# Altium PCB pcb_01.PcbDoc
Units mil, origin at the board's own origin, x right, y up, seen from the top; angles counter-clockwise.
Board outline 1975.01 x 10.03 mil, 2 copper layers (Top Layer, Bottom Layer); 8 components, 4 nets, 21 pads, 0 vias.
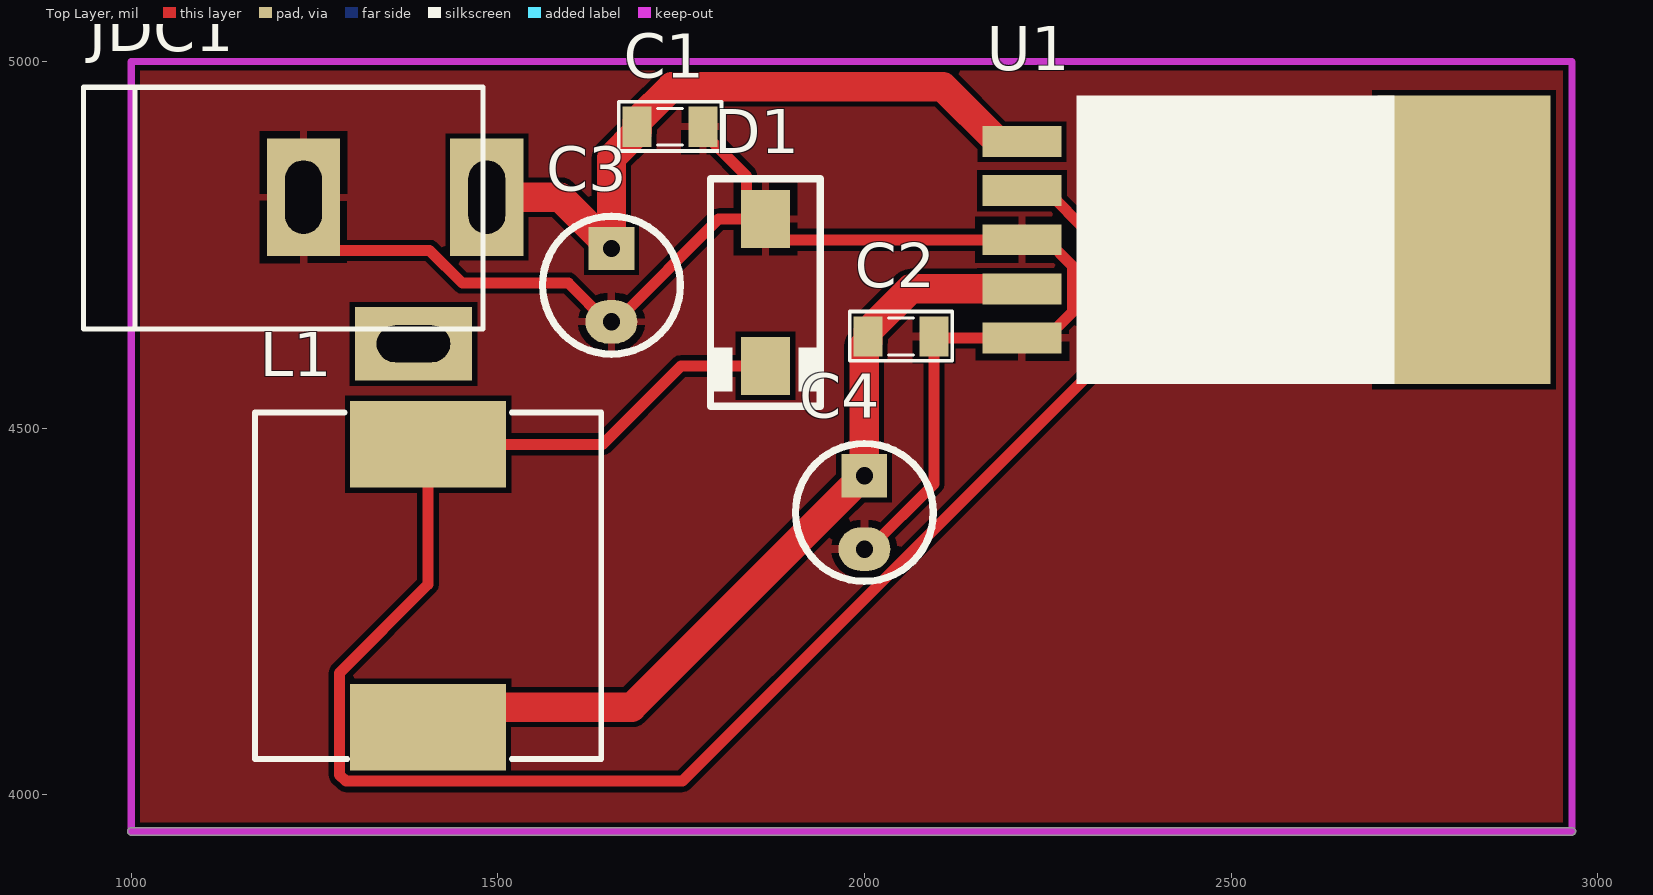
[diagram p0: Top Layer view]
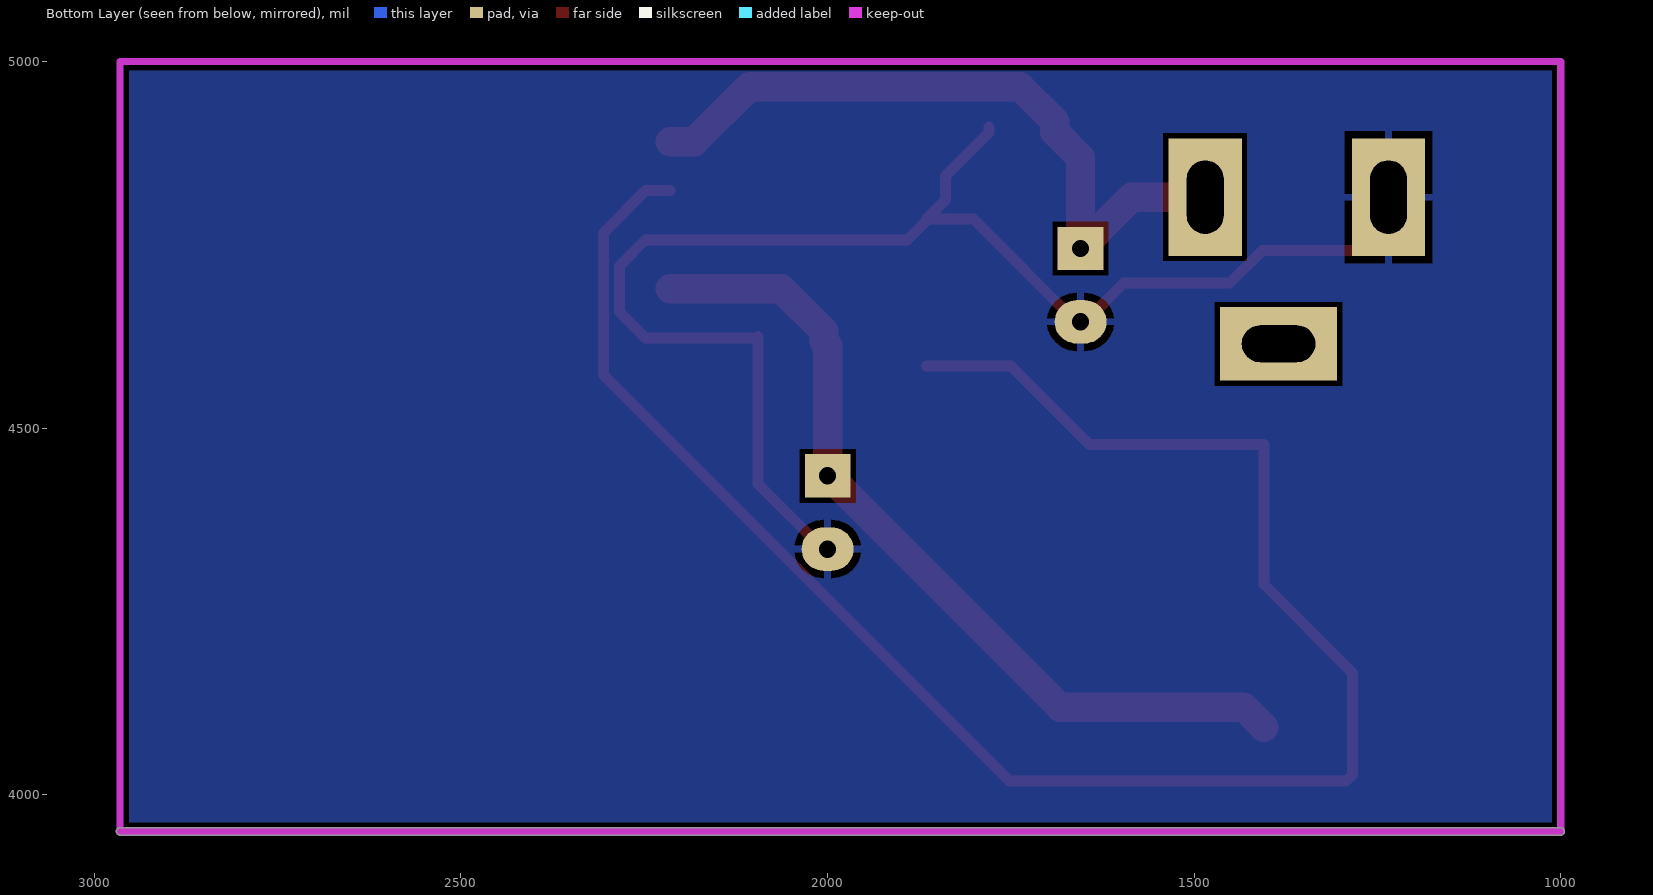
[diagram p1: Bottom Layer view, seen from below]

## Layer stack, top to bottom
Top Solder: solder mask 0.4, Solder Resist, Dk 3.5
Top Layer: signal copper 1.4
Dielectric 1: dielectric 12.6, FR-4, Dk 4.8
Bottom Layer: signal copper 1.4
Bottom Solder: solder mask 0.4, Solder Resist, Dk 3.5

## Board outline
1000,3944.99 cw(c1000,3950) 1000,3955.01 2965,3955.01 cw(c2965,3950) 2970.01,3950 cw(c2965,3950) 2965,3944.99

## Design rules (kind name [scope] priority, off if disabled: settings)
Clearance [All] p1: gap=7 ignorepadtopadclearanceinfootprint=FALSE
PolygonConnect [All] p1: connectstyle=Relief reliefconductorwidth=10 reliefentries=4 polygonreliefangle="90 Angle" airgapwidth=10
RoutingVias [All] p1: holewidth=14 width=50 viastyle="Through Hole" minholewidth=14 minwidth=50 maxholewidth=28 maxwidth=50
SolderMaskExpansion [All] p1: expansion=4 istentingtop=FALSE
Width [All] p1: maxlimit=40 minlimit=10 preferedwidth=15
30 further rules are at their usual default settings.

## Components (designator, comment, footprint, x,y, rotation, side; value= is the part's Value field where it differs from the comment)
C1 "104" CAP_0805 1735,4911 r180 top value=33p
C2 "680uF.18V" CAP_0805 2050,4625 r180 top value=33p
C3 "CAP-ALU-DIP" CA-ALU-2.54 1655,4695 r270 top value=104
C4 "330uF.10V" CA-ALU-2.54 2000,4385 r270 top value=104
D1 "1N5822" SMA 1865,4685 r270 top value="Diode c?m 1N5408"
JDC1 "Jac DC" DC-IN 1360,4715 r0 top
L1 "33uH" L-SMD-M-12x10 1405,4285 r0 top value="150 mH"
U1 "LM2976" TO263-5 2216,4756.93 r270 top

## Footprints (in the part's own frame and the unit in brackets; to place one, negate y for a bottom-side part, rotate by r counter-clockwise, add the part's x,y. Pads: shape width x height; smd on the part's side, far side on the other; paste and mask are expansions set on the pad)
CA-ALU-2.54 [mm]
  rect 1.5x1.58 hole 0.6: 1(-1.27,0)
  oval 1.5x1.8 hole 0.6: 2(1.27,0)
  silkscreen extent -2.39,-2.39 2.39,2.39, body extent -2,-2.03 1.99,1.97, height 7.01
CAP_0805 [mil]
  rect 39.37x55 smd: 1(-45,0) 2(45,0)
  silkscreen extent -70,-34 70,33, body extent -40,-25 40,25, height 24
DC-IN [mil] "Jac DC input"
  rect 100x160 hole 50 slot 100 at 90 deg: 1(125,100) 2(-125,100)
  rect 160x100 hole 50 slot 100 at 0 deg: 3(25,-100)
  silkscreen extent -425,-80 120,250, body extent -410,-105 134,269, height 434
L-SMD-M-12x10 [mm] "WE-PDA SMD Shielded Power Inductor, 1210"
  rect 5.4x3 smd: 1(0,4.9) 2(0,-4.9)
  silkscreen extent -6,-6 6,6, body extent -6,-6 6,6, height 9.7
SMA [mm]
  rect 2x1.7 smd: 1(-2.544,0) 2(2.544,0)
  silkscreen extent -3.94,-1.9 3.94,1.91, body extent -2.87,-1.4 2.87,1.4, height 2.29
TO263-5 [mm] "LM2576-SMD"
  rect 1.07x2.75 smd: 1(-3.4,-0.025) 2(-1.7,-0.025) 3(0,-0.025) 4(1.7,-0.025) 5(3.4,-0.025)
  rect 10x6 smd: 6(0,15.289)
  silkscreen extent -5,1.85 5,12.88, body extent -5,-0.38 5,15.29, height 4.79

## Part data
C1 C2: library part CapSMD, "Capacitor", LatestRevisionDate=17-Jul-2002, LatestRevisionNote="Re-released for DXP Platform.", PackageReference=RAD-0.3, Published=8-Jun-2000, Publisher="Altium Limited"
C3: "Capacitor (Semiconductor SIM Model)", LatestRevisionDate=17-Jul-2002, LatestRevisionNote="Re-released for DXP Platform.", PackageReference=C1206, Publisher="Altium Limited"
C4: library part CAP-ALU-DIP, "Capacitor (Semiconductor SIM Model)", LatestRevisionDate=17-Jul-2002, LatestRevisionNote="Re-released for DXP Platform.", PackageReference=C1206, Publisher="Altium Limited"
D1: "Schottky Rectifiers"
JDC1: library part DCIN, "Jac DC input"
L1: library part Inductor, "Inductor"
U1: library part LM2596, Max Input Voltage="12 V", Max Output Current="3 (6.0 peak) A", Max Output Voltage=mV, Temperature Range="-40 to +125 degC", Category=IC-Power, Min Input Voltage=mV, Min Output Voltage=mV, Mounting Technology="Surface Mount", Status=Unreleased, Supply Voltage=mV

## Nets (pads, with @x,y where several pads share a name; then routed paths per layer and width w, separated by ;. In a path a pad name is that pad's centre, name@x,y a point inside that pad or via, vN(x,y) a via of type N, cw(c..) or ccw(c..) an arc to the next point about the centre after c; other vN are vias at no path point)
3V3: C2.2 C4.1 L1.2 U1.4 | length 1170.2
  Top Layer w40: L1.2 1432.19,4119.27 1682.7,4119.27 1998.43,4435 C4.1 2000,4612.81 2005,4617.81 C2.2 2005,4632.19 2062.81,4690 U1.4
+12: C1.2 C3.1 JDC1.1 U1.1 | length 963.1
  Top Layer w40: JDC1.1 1585,4815 1643.9,4756.1 1643.9,4754.53 1653.43,4745 C3.1 1655,4868.81 1690,4903.81 C1.2 1690,4918.19 1737.32,4965.5 2107.22,4965.5 2181.93,4890.79 U1.1
GND: C1.1 C2.1 C3.2 C4.2 D1.1 JDC1.2 U1.3 U1.5 | length 1983.2
  Top Layer w15: JDC1.2 1235,4785 1277.5,4742.5 1406.99,4742.5 1451.53,4697.96 1596.13,4697.96 1649.09,4645 C3.2 1660.91,4645 1801.06,4785.16 D1.1 ; C1.1 1780,4903.19 1839.04,4844.15 1839.04,4811.12 D1.1 ; C4.2 2005.91,4335 2095,4424.09 C2.1 2096.93,4623.07 U1.5 2248.07,4623.07 2283.63,4658.63 2283.63,4721.37 2248.07,4756.93 U1.3 1890.96,4756.93 1865,4782.89 D1.1
NetD1_2: D1.2 L1.1 U1.2 | length 2567.9
  Top Layer w15: D1.2 1749.84,4584.84 1642.91,4477.91 L1.1 1405,4287.09 1284.2,4166.29 1284.2,4027.03 1292.69,4018.53 1751.7,4018.53 2305.63,4572.46 2305.63,4766.3 2248.07,4823.86 U1.2
pads on no net: JDC1.3 U1.6

## Polygon pours and split planes (outlines as drawn)
GND on Top Layer "ground" (solid, remove dead copper, pour order 1): 1005,4995 2960,4995 2960,3955 1005,3955
GND on Bottom Layer "ground" (solid, remove dead copper, pour order 2): 2960,4995 1005,4995 1005,3955 2960,3955

## Keep-outs
Keep-Out Layer:
  lines w10: 1000,3950 1000,5000 2965,5000 2965,3950 1000,3950